# Altium PCB PCB_RTM_Loopback.PcbDoc
Units mil, origin at the board's own origin, x right, y up, seen from the top; angles counter-clockwise.
Board outline 1093.25 x 2496.1 mil, 4 copper layers (Top Layer, MidPlane_1, MidPlane_2, Bottom Layer), stack 61.899 mil thick; 15 components, 69 nets, 226 pads, 30 vias.
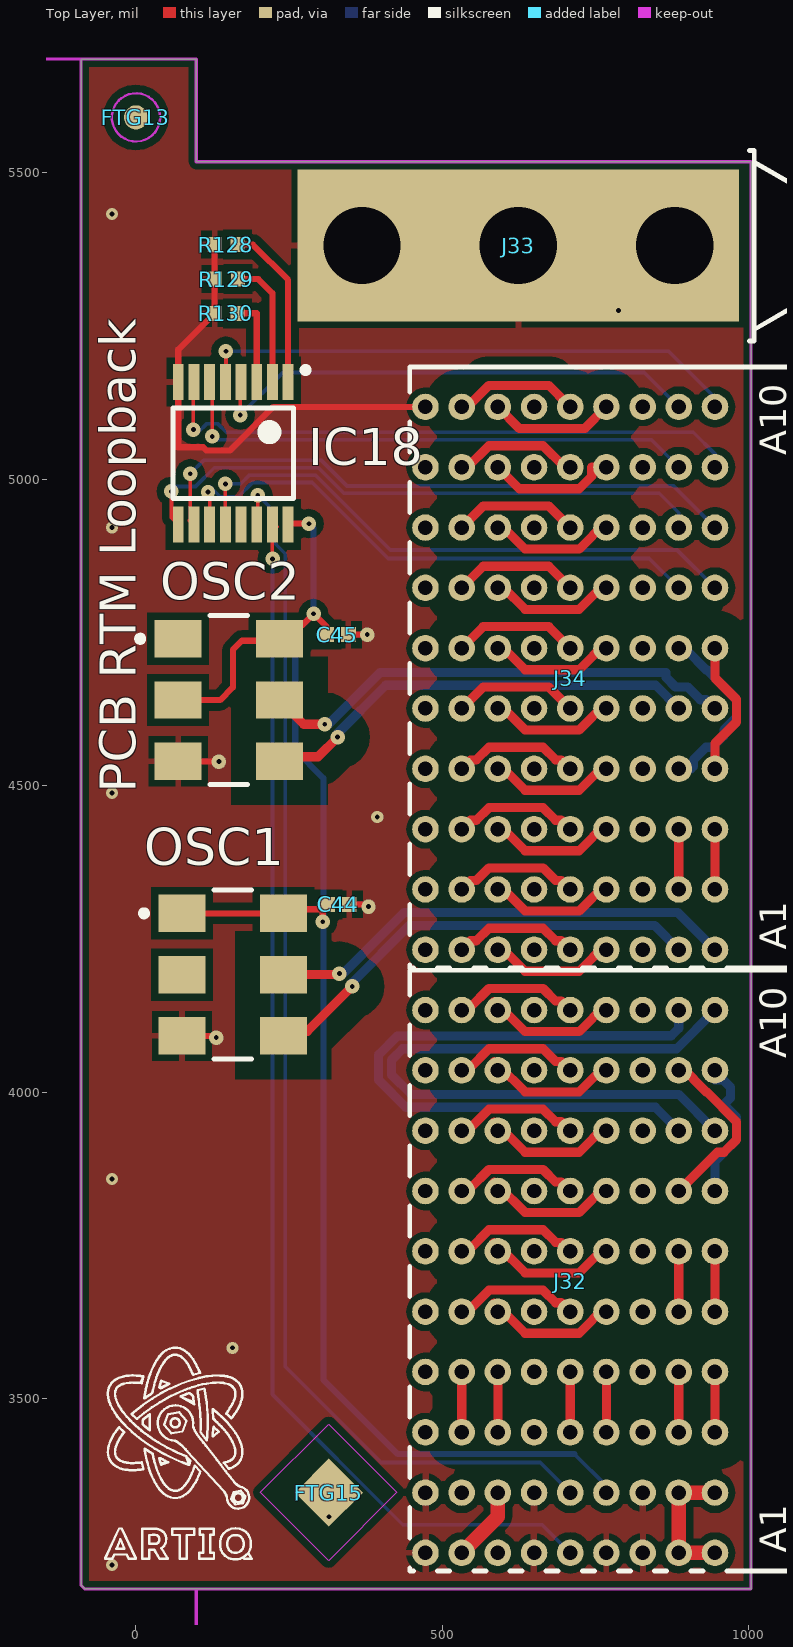
[diagram p0: Top Layer view]
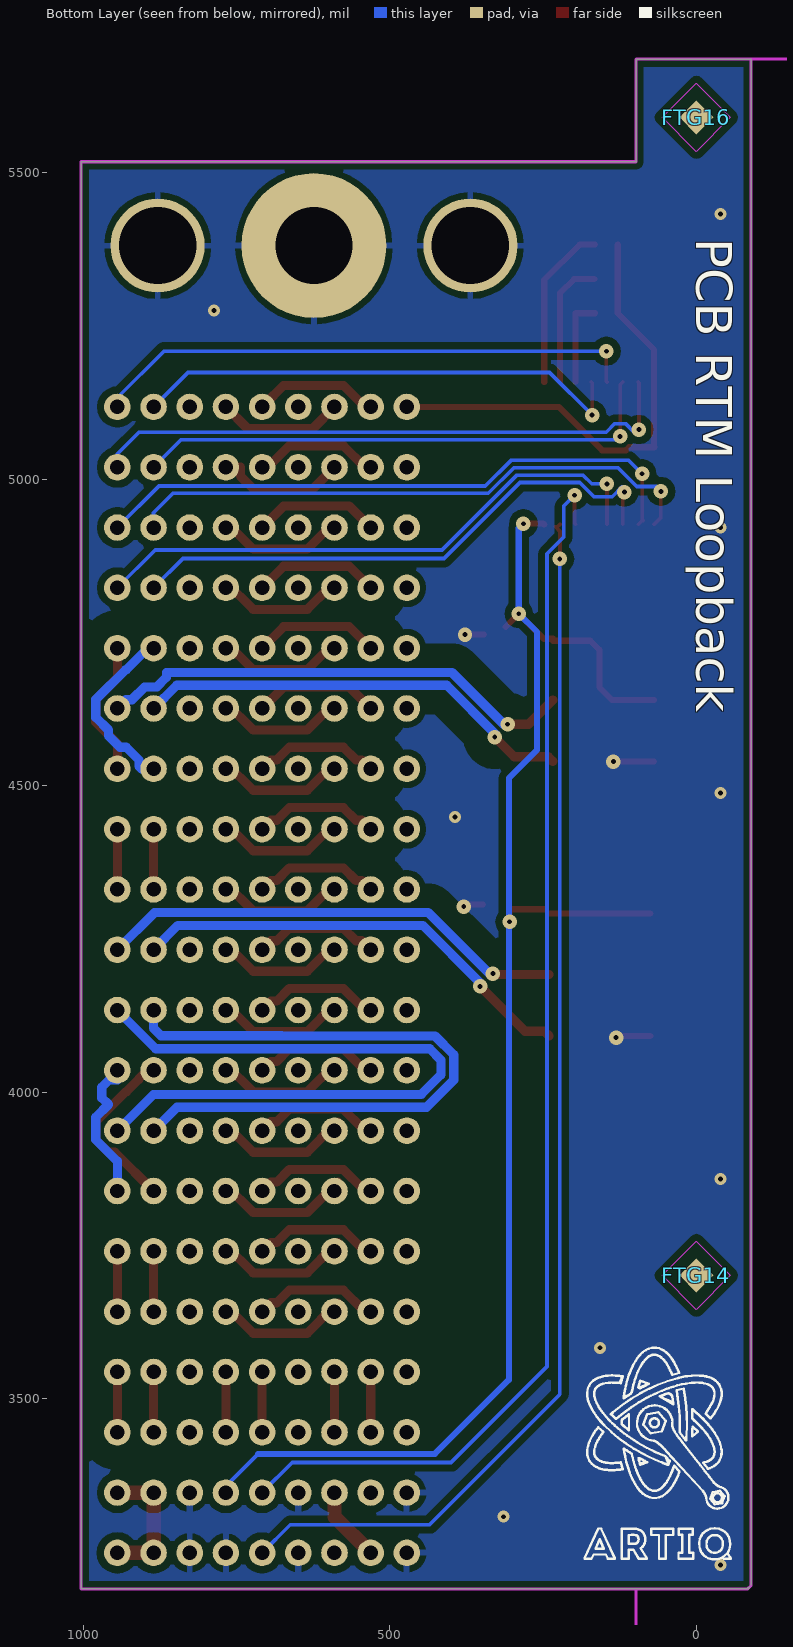
[diagram p1: Bottom Layer view, seen from below]
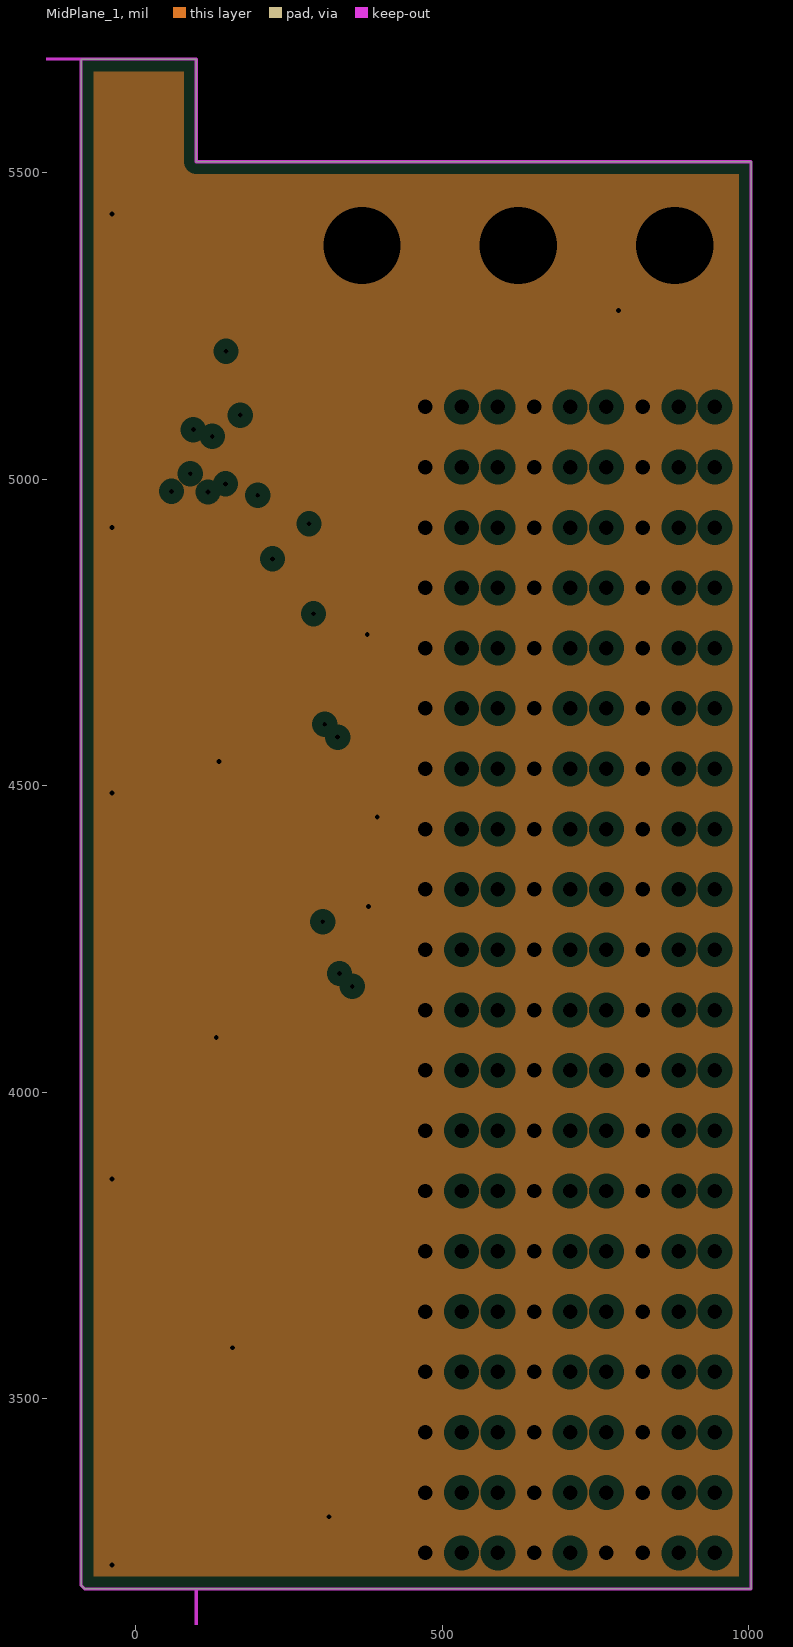
[diagram p2: MidPlane_1, clearances drawn from the general rule]
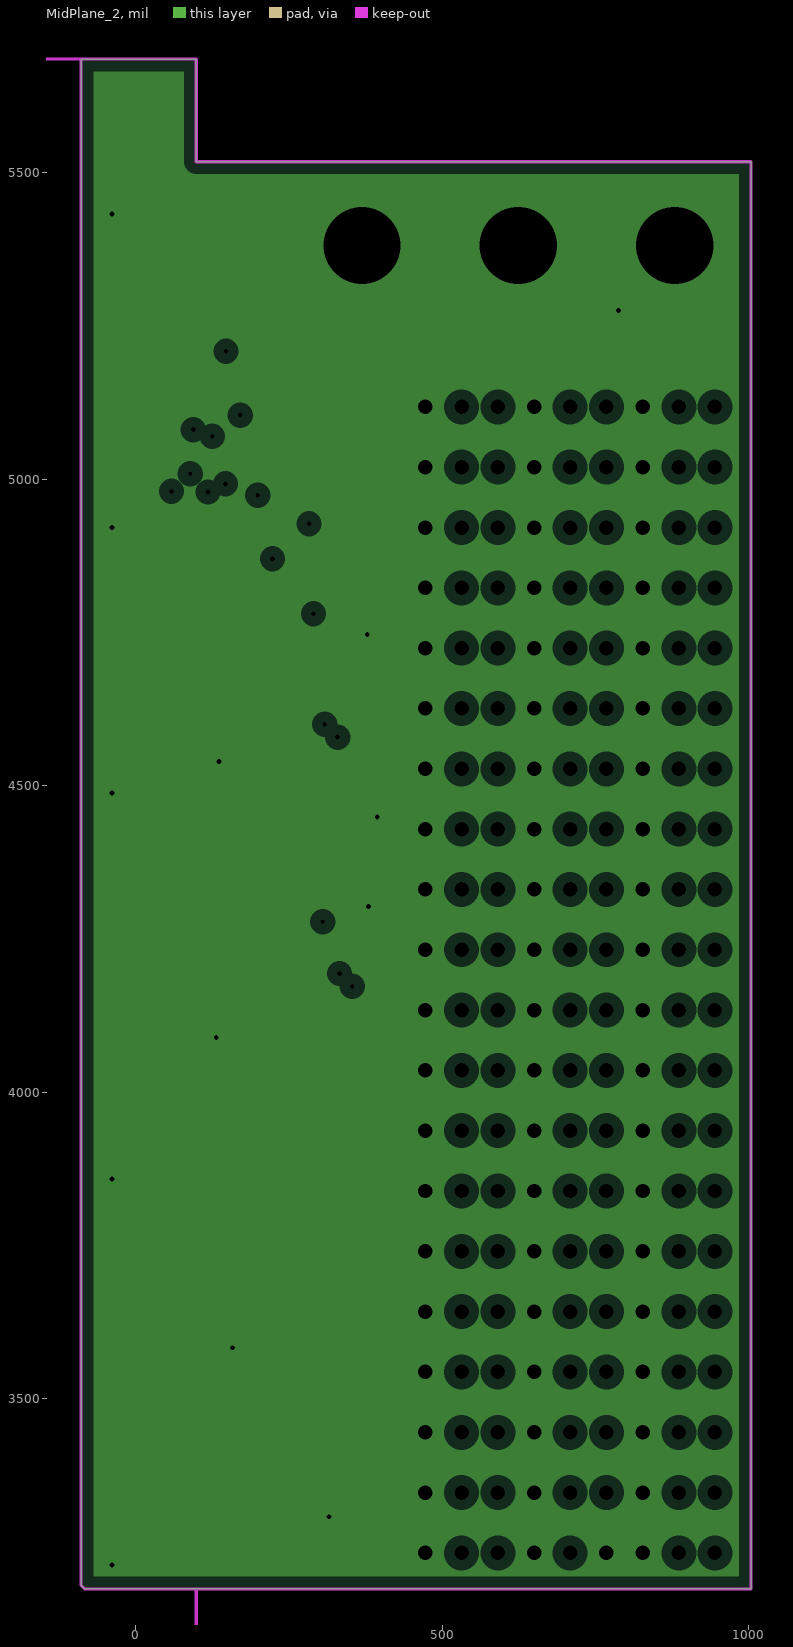
[diagram p3: MidPlane_2, clearances drawn from the general rule]
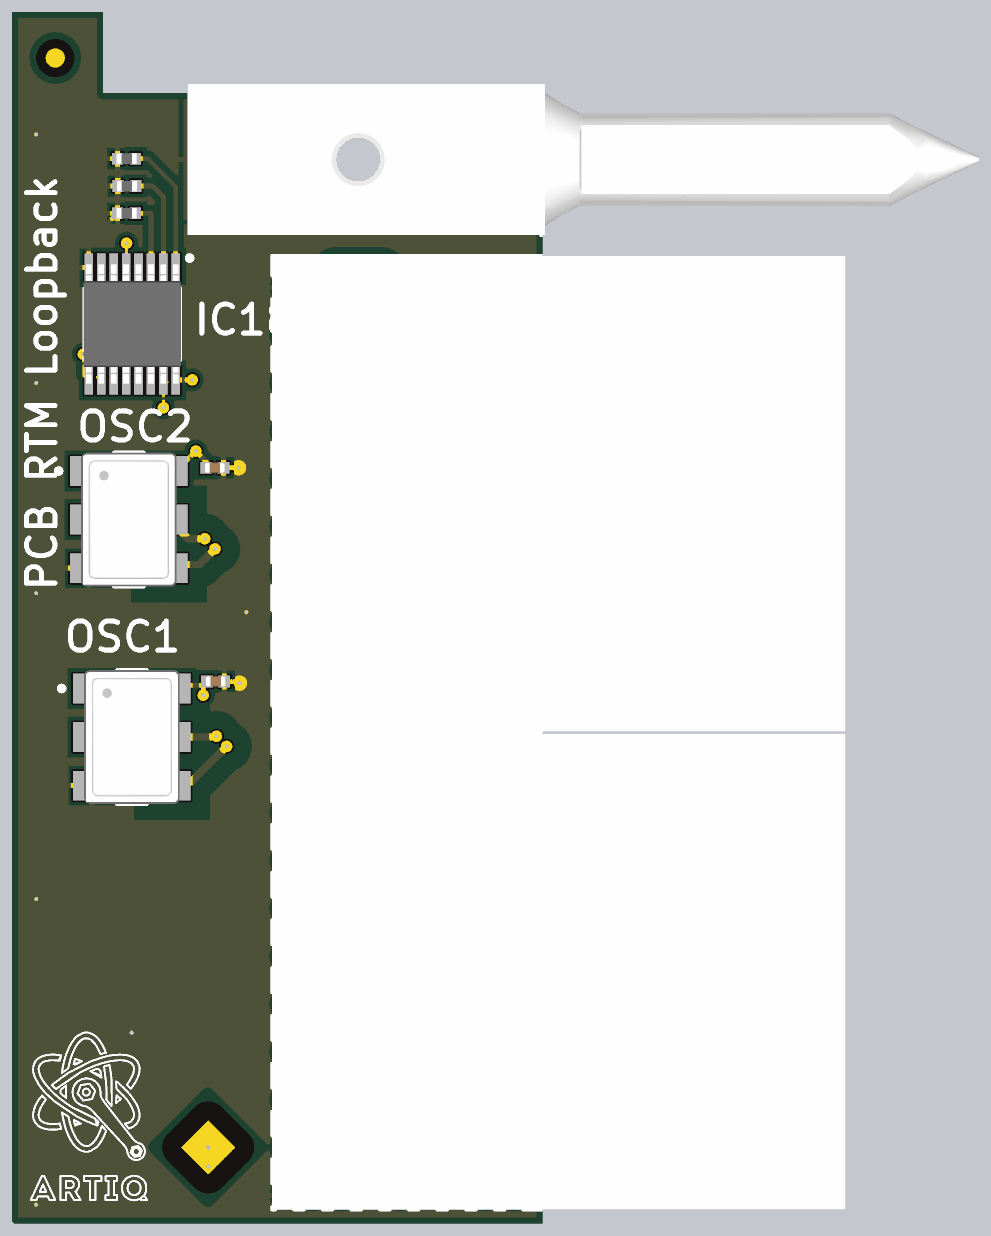
[diagram p4: 3D render of the assembled board from above, using the file's embedded part models]

## Layer stack, top to bottom
Top Solder: solder mask 0.4, Solder Resist, Dk 3.5
Top Layer: signal copper 1.4
Dielectric1: prepreg 14.1732, FR-4, Dk 4.8
MidPlane_1: plane copper 1.4, net GND
Dielectric3: core 27.9528, FR-4, Dk 4.8
MidPlane_2: plane copper 1.4, net GND
Dielectric2: prepreg 14.1732, FR-4, Dk 4.8
Bottom Layer: signal copper 1.4
Bottom Solder: solder mask 0.4, Solder Resist, Dk 3.5

## Board outline
-89.37,3194.88 -83.92,3189.43 1003.88,3189.43 1003.88,5518.13 98.38,5518.13 98.38,5685.53 -89.37,5685.53

## Design rules (kind name [scope] priority, off if disabled: settings)
Clearance Clearance_KO [OnLayer('Keep-Out Layer')] p1: gap=10
Clearance Clearance_Poly_DS [(InDifferentialPairClass('All Differential Pairs')) vs InPolygon] p2: gap=40
Clearance Clearance_Poly [InPolygon] p3: gap=11.81
Clearance Clearance_DS&CLK [(InNet('SFP_CLK*') OR InNet('FPGA_CLK*'))] p4: gap=6
Clearance Clearance_DS&RTM [WithinRoom('U_RTM_Connectors')] p5: gap=6
Clearance Clearance_DS [All] p6: gap=50
Clearance [All] p7: gap=6 except(15: Arc-Poly Track-Poly SMDPad-Poly THPad-Poly Via-Poly Fill-Poly Poly-Poly)
DiffPairsRouting [All] p1: maxlimit=6 minlimit=6 mostfreqgap=6 toplayer_minwidth=15 toplayer_maxwidth=15 toplayer_prefwidth=15 bottomlayer_minwidth=15 bottomlayer_maxwidth=15 bottomlayer_prefwidth=15 maxuncoupledlength=500
HoleSize [All] p1: absolutevalues=TRUE maxlimit=472.44 minlimit=1 maxpercent=80.000 minpercent=20.000
MinimumSolderMaskSliver [All] p1: minsoldermaskwidth=0
PlaneClearance [All] p1: clearance=16.73
PlaneConnect PlaneConnect_Via [IsVia] p1: planeconnectstyle=Direct reliefexpansion=20 reliefentries=4 reliefconductorwidth=10 reliefairgap=10
PlaneConnect [All] p2: planeconnectstyle=Relief reliefexpansion=10 reliefentries=4 reliefconductorwidth=10 reliefairgap=10
PolygonConnect PolygonConnect_Via [IsVia] p1: connectstyle=Direct reliefconductorwidth=10 reliefentries=4 polygonreliefangle="90 Angle" airgapwidth=10
PolygonConnect [All] p2: connectstyle=Relief reliefconductorwidth=10 reliefentries=4 polygonreliefangle="90 Angle" airgapwidth=10
RoomDefinition PCB_RTM_Loopback [InComponentClass('PCB_RTM_Loopback')] p1: confinementstyle=ConfineIn formatcopy=TRUE lockcomponents=FALSE outline -6375.21,3085.88 -4059.86,3085.88 -4059.86,3726.04 -6375.21,3726.04
RoutingVias [All] p1: holewidth=7.87 width=23.62 viastyle="Through Hole" minholewidth=7.87 minwidth=23.62 maxholewidth=23.62 maxwidth=47.24
SilkToSilkClearance [All] p1: silktosilkclearance=6
SilkToSolderMaskClearance SilkscreenOverComponentPads [IsPad] p1: minsilkscreentomaskgap=0 clearancetoexposedcopper=TRUE
SolderMaskExpansion [All] p1: expansion=4
Width Width_DS [(InDifferentialPairClass('All Differential Pairs'))] p1: maxlimit=12 minlimit=6 preferedwidth=12
Width [All] p2: maxlimit=23.54 minlimit=6 preferedwidth=23.54 minimp=50.000000 maximp=50.000000 favimp=50.000000
23 further rules are at their usual default settings.

## Classes and differential pairs
differential pair CLK2: +CLK2_P -CLK2_N
differential pair SFP8TX: +SFP8TX_P -SFP8TX_N
differential pair SFP8RX: +SFP8RX_P -SFP8RX_N
differential pair SFP7TX: +SFP7TX_P -SFP7TX_N
differential pair SFP7RX: +SFP7RX_P -SFP7RX_N
differential pair SFP6TX: +SFP6TX_P -SFP6TX_N
differential pair SFP6RX: +SFP6RX_P -SFP6RX_N
differential pair SFP5TX: +SFP5TX_P -SFP5TX_N
differential pair SFP5RX: +SFP5RX_P -SFP5RX_N
differential pair SFP4TX: +SFP4TX_P -SFP4TX_N
differential pair SFP4RX: +SFP4RX_P -SFP4RX_N
differential pair SFP3TX: +SFP3TX_P -SFP3TX_N
differential pair SFP3RX: +SFP3RX_P -SFP3RX_N
differential pair SFP2TX: +SFP2TX_P -SFP2TX_N
differential pair SFP2RX: +SFP2RX_P -SFP2RX_N
differential pair SFP1TX: +SFP1TX_P -SFP1TX_N
differential pair SFP1RX: +SFP1RX_P -SFP1RX_N
differential pair LVDS8: +LVDS8_P -LVDS8_N
differential pair LVDS7: +LVDS7_P -LVDS7_N
differential pair LVDS6: +LVDS6_P -LVDS6_N
differential pair LVDS5: +LVDS5_P -LVDS5_N
differential pair LVDS4: +LVDS4_P -LVDS4_N
differential pair LVDS3: +LVDS3_P -LVDS3_N
differential pair LVDS2: +LVDS2_P -LVDS2_N
differential pair LVDS1: +LVDS1_P -LVDS1_N
differential pair CLK1: +CLK1_P -CLK1_N

## Components (designator, comment, footprint, x,y, rotation, side; value= is the part's Value field where it differs from the comment)
C44 "100nF" CAPC1005X55N 330.32,4306.3 r180 top
C45 "100nF" CAPC1005X55N 328.74,4746.46 r180 top
FTG13 "Use only in PCB" FIDUCIAL_TOP_C100-200 0,5590.55 r90 top
FTG14 "Use only in PCB" FIDUCIAL_TOP_S100-200 0,3700.79 r90 bottom
FTG15 "Use only in PCB" FIDUCIAL_TOP_S200-400 314.96,3346.46 r0 top
FTG16 "Use only in PCB" FIDUCIAL_TOP_S100-200 0,5590.55 r90 bottom
IC18 "PCA9534PW" SOP65P640X110-16N 158.66,5042.52 r270 top
J32 "Family" TYCO_6469183-1 708.66,3690.95 r0 top locked
J33 "Family" TYCO_1469265-1 624,5381.35 r0 top
J34 "Family" TYCO_6469183-1 708.66,4675.2 r0 top locked
OSC1 "125MHz" OSC_SILICON-LAB_SI531 157.87,4191.73 r0 top
OSC2 "156.25MHz" OSC_SILICON-LAB_SI530 151.57,4639.76 r0 top
R128 "0" RESC1005X40N 146.85,5383.07 r0 top
R129 "0" RESC1005X40N 147.64,5326.77 r0 top
R130 "0" RESC1005X40N 146.85,5270.87 r0 top

## Footprints (in the part's own frame and the unit in brackets; to place one, negate y for a bottom-side part, rotate by r counter-clockwise, add the part's x,y. Pads: shape width x height; smd on the part's side, far side on the other; paste and mask are expansions set on the pad)
CAPC1005X55N [mm] "Chip Capacitor, Body 1.0x0.55mm, IPC Medium Density"
  rect 0.62x0.62 smd: 1(-0.45,0) 2(0.45,0)
  body extent -0.52,-0.27 0.53,0.28, height 0.55
FIDUCIAL_TOP_C100-200 [mm] "Round Fiducial Target, Top Layer, 1.0mm, Top Solder 2.0mm, Keepout =2.0mm"
  round 1 smd paste-0.51 mask+0.5: FTG2(0,0)
  Top Layer keep-out circle w0.1: c0,0 r1
FIDUCIAL_TOP_S100-200 [mm] "Square Fiducial Target, Top Layer, 1.0mm, Top Solder 2.0mm, Keepout =2.0mm"
  rect 1x1 smd rot 45 paste-0.51 mask+0.5: 1(0,0)
  Top Layer keep-out region: 1.414,0 0,-1.414 -1.414,0 0,1.414
FIDUCIAL_TOP_S200-400 [mm] "Square Fiducial Target, Top Layer, 2.0mm, Top Solder 4.0mm, Keepout =4.0mm"
  rect 2x2 smd rot 45 paste-0.9 mask+1: 1(0,0)
  Top Layer keep-out region: -2.839,0.011 -0.011,2.839 2.818,0.011 -0.011,-2.818
OSC_SILICON-LAB_SI530 [mm] "Oscillator Si530 Series, 6 pins, 5x7mm"
  rect 1.95x1.55 smd: 1(-2.1,2.54) 2(-2.1,0) 3(-2.1,-2.54) 4(2.1,-2.54) 5(2.1,0) 6(2.1,2.54)
  silkscreen extent -3.8,-3.5 0.77,3.5, body extent -2.5,-3.5 2.5,3.5, height 1.8
OSC_SILICON-LAB_SI531 [mm] "Oscillator Si531 Series, 6 pins, 5x7mm"
  rect 1.95x1.55 smd: 1(-2.1,2.54) 2(-2.1,0) 3(-2.1,-2.54) 4(2.1,-2.54) 5(2.1,0) 6(2.1,2.54)
  silkscreen extent -3.8,-3.5 0.77,3.5, body extent -2.5,-3.5 2.5,3.5, height 1.8
RESC1005X40N [mm] "Chip Resistor, EIA 0402, Metric 1005, Body 1.0x0.5mm, IPC Medium Density"
  rect 0.58x0.62 smd: 1(-0.47,0) 2(0.47,0)
  body extent -0.52,-0.27 0.53,0.28, height 0.4
SOP65P640X110-16N [mm] "SOP, 0.65mm pitch; 16 pin, 4.40mm W X 5.00mm L X 1.10mm H body IPC Medium Density"
  rect 1.5x0.45 smd: 1(-2.95,2.275) 2(-2.95,1.625) 3(-2.95,0.975) 4(-2.95,0.325) 5(-2.95,-0.325) 6(-2.95,-0.975) 7(-2.95,-1.625) 8(-2.95,-2.275) 9(2.95,-2.275) 10(2.95,-1.625) 11(2.95,-0.975) 12(2.95,-0.325) 13(2.95,0.325) 14(2.95,0.975) 15(2.95,1.625) 16(2.95,2.275)
  silkscreen extent -3.57,-2.5 1.88,3.13, body extent -3.12,-2.55 3.12,2.55, height 1.1
TYCO_1469265-1 [mm] "Universal Right Angle Male Power Module Guide (keyed)"
  round 3.9 hole 3.2: 1(-6.48,0) 1(6.48,0)
  rect 18.3x6.3 smd paste-4.15 mask-4.15: 1(0,0)
  round 6 hole 3.2: 1(0,0)
  silkscreen extent 9.58,-3.96 32.55,3.94, body extent -8.92,-3.95 32.53,3.95, height 9.7
TYCO_6469183-1 [mm] "60 Positions, Pitch 2.5mm,  Advanced TCA, Z-PACK HM-Zd BackPlane Press Fit Header"
  round 1.1 hole 0.6: A1(6,-11.25) A2(6,-8.75) A3(6,-6.25) A4(6,-3.75) A5(6,-1.25) A6(6,1.25) A7(6,3.75) A8(6,6.25) A9(6,8.75) A10(6,11.25) B1(4.5,-11.25) B2(4.5,-8.75) B3(4.5,-6.25) B4(4.5,-3.75) B5(4.5,-1.25) B6(4.5,1.25) B7(4.5,3.75) B8(4.5,6.25) B9(4.5,8.75) B10(4.5,11.25) BG1(3,-11.25) BG2(3,-8.75) BG3(3,-6.25) BG4(3,-3.75) BG5(3,-1.25) BG6(3,1.25) BG7(3,3.75) BG8(3,6.25) BG9(3,8.75) BG10(3,11.25) C1(1.5,-11.25) C2(1.5,-8.75) C3(1.5,-6.25) C4(1.5,-3.75) C5(1.5,-1.25) C6(1.5,1.25) C7(1.5,3.75) C8(1.5,6.25) C9(1.5,8.75) C10(1.5,11.25) D1(0,-11.25) D2(0,-8.75) D3(0,-6.25) D4(0,-3.75) D5(0,-1.25) D6(0,1.25) D7(0,3.75) D8(0,6.25) D9(0,8.75) D10(0,11.25) DG1(-1.5,-11.25) DG2(-1.5,-8.75) DG3(-1.5,-6.25) DG4(-1.5,-3.75) DG5(-1.5,-1.25) DG6(-1.5,1.25) DG7(-1.5,3.75) DG8(-1.5,6.25) DG9(-1.5,8.75) DG10(-1.5,11.25) E1(-3,-11.25) E2(-3,-8.75) E3(-3,-6.25) E4(-3,-3.75) E5(-3,-1.25) E6(-3,1.25) E7(-3,3.75) E8(-3,6.25) E9(-3,8.75) E10(-3,11.25) F1(-4.5,-11.25) F2(-4.5,-8.75) F3(-4.5,-6.25) F4(-4.5,-3.75) F5(-4.5,-1.25) F6(-4.5,1.25) F7(-4.5,3.75) F8(-4.5,6.25) F9(-4.5,8.75) F10(-4.5,11.25) FG1(-6,-11.25) FG2(-6,-8.75) FG3(-6,-6.25) FG4(-6,-3.75) FG5(-6,-1.25) FG6(-6,1.25) FG7(-6,3.75) FG8(-6,6.25) FG9(-6,8.75) FG10(-6,11.25)
  silkscreen extent -6.65,-12 23.35,12.9, body extent -6.65,-12 23.35,12.9, height 13.31

## Part data
C44 C45: library part CC0402_100NF_16V_10%_X7R, "Non-polarised capacitor"
FTG13: library part FIDUCIAL_TARGET_C100-200, "Fiducial Target"
FTG14 FTG16: library part FIDUCIAL_TARGET_S100-200, "Fiducial Target"
FTG15: library part FIDUCIAL_TARGET_S200-400, "Fiducial Target"
IC18: "8-Bit I2C-Bus and SMBus Low Power I/O Port with Interrupt"
J32 J34: library part TYCO_6469183-1, "Connector 60 ATCA Male 30 Pairs (60 Signals) + 3x10 Ground"
J33: library part TYCO_1469265-1, "Single Pin Male"
OSC1: library part OSC_125MHZ_SILICON-LAB_531BC125M000DG, "10-1400MHz, Crystal Oscillator (XO), Si531 Series"
OSC2: library part OSC_156.25MHZ_SILICON-LAB_530BC156M250DG, "10-1400MHz, Crystal Oscillator (XO), Si530 Series"
R128 R129 R130: library part R0402_0R_JUMPER, "Resistor"

## Via types
v1: diameter 23.62, hole 7.87, Top Layer to Bottom Layer, 21 vias
v2: diameter 19.68, hole 7.87, Top Layer to Bottom Layer, tented both sides, 9 vias

## Nets (pads, with @x,y where several pads share a name; then routed paths per layer and width w, separated by ;. In a path a pad name is that pad's centre, name@x,y a point inside that pad or via, vN(x,y) a via of type N, cw(c..) or ccw(c..) an arc to the next point about the centre after c; other vN are vias at no path point)
CLK1_N: J34.A1 OSC1.5 | length 771.5
  Top Layer w15: OSC1.5 330.35,4191.73 v1(332.1,4193.49)
  Bottom Layer w15: v1(332.1,4193.49) 338.2,4193.49 437.76,4293.05 884.12,4293.05 J34.A1
CLK1_P: J34.B1 OSC1.4 | length 740
  Top Layer w15: OSC1.4 248.05,4099.23 279.74,4099.23 v1(353.05,4172.54)
  Bottom Layer w15: v1(353.05,4172.54) 353.05,4178.64 446.46,4272.05 846.06,4272.05 J34.B1
CLK2_N: J34.A5 OSC2.5 | length 792.3
  Top Layer w15: OSC2.5 273.83,4600.18 v1(308.09,4600.18)
  Bottom Layer w15: v1(308.09,4600.18) 309.17,4599.1 313.1,4599.1 398.78,4684.78 864.83,4684.78 864.83,4676.68 880.37,4661.14 900.39,4661.14 920.98,4640.55 920.98,4640.14 930.73,4640.14 J34.A5
CLK2_P: J34.B5 OSC2.4 | length 723.1
  Top Layer w15: OSC2.4 241.75,4547.26 297.06,4547.26 v1(329.03,4579.24)
  Bottom Layer w15: v1(329.03,4579.24) 327.95,4580.31 327.95,4584.25 407.48,4663.78 848.03,4663.78 J34.B5
GND: C44.1 C45.1 IC18.8 J32.BG1 J32.BG2 J32.BG3 J32.BG4 J32.BG5 J32.BG6 J32.BG7 J32.BG8 J32.BG9 J32.BG10 J32.C1 J32.DG1 J32.DG2 J32.DG3 J32.DG4 J32.DG5 J32.DG6 J32.DG7 J32.DG8 J32.DG9 J32.DG10 J32.FG1 J32.FG2 J32.FG3 J32.FG4 J32.FG5 J32.FG6 J32.FG7 J32.FG8 J32.FG9 J32.FG10 J33.1 J34.BG1 J34.BG2 J34.BG3 J34.BG4 J34.BG5 J34.BG6 J34.BG7 J34.BG8 J34.BG9 J34.BG10 J34.DG1 J34.DG2 J34.DG3 J34.DG4 J34.DG5 J34.DG6 J34.DG7 J34.DG8 J34.DG9 J34.DG10 J34.FG1 J34.FG2 J34.FG3 J34.FG4 J34.FG5 J34.FG6 J34.FG7 J34.FG8 J34.FG9 J34.FG10 OSC1.3 OSC2.3 R128.1 R129.1 R130.1 | length 984.5
  Top Layer w10: OSC2.3 135.04,4539.76 v1(135.43,4539.37) ; OSC1.3 128.35,4091.73 v1(131.1,4088.98) ; R128.1 R130.1 69.09,5211.61 IC18.8 69.09,5052.95 68.5,5052.36 109.87,5052.36 114.96,5047.27 153.57,5047.27 224.41,5118.11 J34.FG10 ; C45.1 v1(377.56,4746.46) ; C44.1 375.91,4306.3 v1(379.48,4302.73) v1@385.35,4302.73
  other v2: -39.37,3228.35 314.96,3307.09 157.48,3582.68 -39.37,3858.27 393.7,4448.82 -39.37,4488.19 -39.37,4921.26 787.4,5275.59 -39.37,5433.07
IO0: IC18.4 J34.B10 | length 822.4
  Top Layer w6: v1(170.08,5104.72) 170.08,5157.28 IC18.4
  Bottom Layer w6: v1(170.08,5104.72) 239.76,5174.41 829.53,5174.41 J34.B10
IO1: IC18.5 J34.A10 | length 895.3
  Top Layer w6: IC18.5 146.85,5159.65 v1(146.85,5209.06)
  Bottom Layer w6: v1(146.85,5209.06) 868.9,5209.06 944.88,5133.07 J34.A10
IO2: IC18.6 J34.B9 | length 872.6
  Top Layer w6: IC18.6 124.41,5154.53 v1(124.41,5070.08)
  Bottom Layer w6: v1(124.41,5070.08) 129.72,5064.77 840.74,5064.77 J34.B9
IO3: IC18.7 J34.A9 | length 979
  Top Layer w6: v1(93.7,5081.1) 93.7,5157.68 IC18.7
  Bottom Layer w6: v1(93.7,5081.1) 98.03,5076.77 101.67,5076.77 115.79,5090.89 133.03,5090.89 147.15,5076.77 909.45,5076.77 944.88,5041.34 J34.A9
IO4: IC18.9 J34.B8 | length 957
  Top Layer w6: v1(57.87,4980.31) 57.87,4937.6 IC18.9
  Bottom Layer w6: v1(57.87,4980.31) 65.8,4988.24 97.2,4988.24 127.79,5018.83 297.71,5018.83 339.5,4977.03 854.07,4977.03 885.83,4945.28 J34.B8
IO5: IC18.10 J34.A8 | length 998.1
  Top Layer w6: v1(88.58,5009.06) 88.58,4934.31 86.95,4932.68 88.39,4932.68 IC18.10
  Bottom Layer w6: v1(88.58,5009.06) 110.35,5030.83 302.68,5030.83 344.47,4989.03 877.11,4989.03 J34.A8
IO6: IC18.11 J34.B7 | length 925.1
  Top Layer w6: v1(117.54,4979.15) 117.54,4980.92 120.28,4983.65 IC18.11
  Bottom Layer w6: v1(117.54,4979.15) 117.54,4983.98 121.36,4987.8 137.44,4971.71 167.08,4971.71 190.2,4994.83 287.77,4994.83 411.73,4870.87 837.8,4870.87 J34.B7
IO7: IC18.12 J34.A7 | length 947.2
  Top Layer w6: IC18.12 145.87,4992.32 v1(146.06,4992.52)
  Bottom Layer w6: v1(146.06,4992.52) 170.92,4992.52 185.23,5006.83 292.74,5006.83 414.92,4884.65 883.07,4884.65 J34.A7
LVDS1_N: J32.A7 J32.A9 | length 242.6
  Bottom Layer w15: J32.A7 944.88,3887.29 980.04,3922.45 980.04,3959.05 959.39,3979.69 970.21,3990.51 970.21,4007.91 957.91,4020.21 944.88,4020.21 J32.A9
LVDS1_P: J32.B7 J32.B9 | length 287.6
  Top Layer w15: J32.B7 949.1,3901.85 959.44,3901.85 980.04,3922.45 980.04,3951.57 931.32,4000.28 930.32,4000.28 909.73,4020.87 909.73,4021.88 896.17,4035.43 J32.B9
LVDS2_N: J32.A8 J32.A10 | length 1151.7
  Bottom Layer w15: J32.A8 885.69,3996.2 449.08,3996.2 416.93,4028.35 416.93,4052.36 435.15,4070.59 696.96,4070.59 697.24,4070.87 882.28,4070.87 944.88,4133.46 J32.A10
LVDS2_P: J32.B8 J32.B10 | length 1104.2
  Bottom Layer w15: J32.B10 885.83,4104.11 873.59,4091.87 676.8,4091.87 676.52,4091.59 426.46,4091.59 395.93,4061.06 395.93,4019.65 440.38,3975.2 847.64,3975.2 J32.B8 J32.B8@887.01,3937.01
LVDS3_N: J32.A5 J32.A6 | length 98.4
  Top Layer w15: J32.A5 J32.A6
LVDS3_P: J32.B5 J32.B6 | length 98.4
  Top Layer w15: J32.B5 J32.B6
LVDS4_N: J32.A3 J32.A4 | length 98.4
  Top Layer w15: J32.A3 J32.A4
LVDS4_P: J32.B3 J32.B4 | length 98.4
  Top Layer w15: J32.B3 J32.B4
LVDS5_N: J32.C3 J32.C4 | length 98.4
  Top Layer w15: J32.C3 J32.C4
LVDS5_P: J32.D3 J32.D4 | length 98.4
  Top Layer w15: J32.D3 J32.D4
LVDS6_N: J32.E3 J32.E4 | length 98.4
  Top Layer w15: J32.E3 J32.E4
LVDS6_P: J32.F3 J32.F4 | length 98.4
  Top Layer w15: J32.F3 J32.F4
LVDS7_N: J34.A4 J34.A6 | length 226
  Top Layer w15: J34.A4 944.88,4568.79 980.04,4603.94 980.04,4640.55 944.88,4675.7 J34.A6
LVDS7_P: J34.B4 J34.B6 | length 281.9
  Bottom Layer w15: J34.B4 905.51,4527.56 909.73,4531.78 909.73,4542.12 930.32,4562.71 940.67,4562.71 959.44,4581.49 959.44,4590.83 980.04,4611.42 980.04,4640.55 931.32,4689.26 930.32,4689.26 J34.B6@900.34,4719.24
LVDS8_N: J34.A2 J34.A3 | length 98.4
  Top Layer w15: J34.A2 J34.A3
LVDS8_P: J34.B2 J34.B3 | length 98.4
  Top Layer w15: J34.B2 J34.B3
NetIC18_1: IC18.1 R128.2 | length 273.5
  Top Layer w10: R128.2 190.55,5383.07 248.23,5325.39 IC18.1
NetIC18_2: IC18.2 R129.2 | length 211.1
  Top Layer w10: R129.2 199.61,5326.77 222.64,5303.74 IC18.2
NetIC18_3: IC18.3 R130.2 | length 143.9
  Top Layer w10: R130.2 197.05,5270.87 IC18.3
NetIC18_14: IC18.14 J32.D2 | length 2039.1
  Top Layer w6: IC18.14 198.82,4928.15 v1(198.82,4974.02)
  Bottom Layer w6: v1(198.82,4974.02) 216.54,4956.3 216.54,4905.81 243.65,4878.7 243.65,3552.02 400.22,3395.45 659.67,3395.45 J32.D2
NetIC18_15: IC18.15 J32.D1 | length 2021.4
  Top Layer w6: IC18.15 226.57,4922.44 230.37,4922.44 222.64,4914.71 222.64,4870.28 v1(222.83,4870.08)
  Bottom Layer w6: v1(222.83,4870.08) 222.83,3506.69 435.43,3294.09 662.6,3294.09 J32.D1
NetJ32_e2: J32.E2 J32.F1 | length 122.9
  Top Layer w23.54: J32.F1 590.55,3307.09 J32.E2
P3V3MP: C44.2 C45.2 IC18.16 J32.C2 OSC1.1 OSC1.6 OSC2.2 OSC2.6 | length 2597.8
  Top Layer w10: OSC2.2 137.4,4639.76 158.27,4660.63 158.27,4722.05 172.83,4736.61 OSC2.6@234.25,4736.61 ; OSC1.1 OSC1.6 ; OSC2.6 248.82,4739.76 v1(289.76,4780.71) 311.02,4759.45 ; OSC1.6@247.24,4298.43 304.72,4298.43 v1(304.72,4277.95) ; IC18.16 249.41,4927.56 v1(282.28,4927.56)
  Bottom Layer w6: 715.35,3409.45 767.72,3357.09 J32.C2
  Bottom Layer w10: v1(282.28,4927.56) 289.76,4920.08 v1(289.76,4780.71) 259.84,4750.79 259.84,4558.27 305.91,4512.2 305.91,3530.31 426.77,3409.45 715.35,3409.45
P12V: J32.A1 J32.A2 J32.B1 J32.B2 | length 230.6
  Top Layer w23.54: J32.A1 895.77,3248.03 885.83,3238.09 J32.B1 J32.B2 J32.A2
SFP1RX_N: J34.D10 J34.F10 | length 192.4
  Top Layer w15: J34.F10@546.01,5123.28 575.99,5153.26 673.51,5153.26 703.99,5122.78 J34.D10@703.99,5113.44
SFP1RX_P: J34.C10 J34.E10 | length 206.3
  Top Layer w15: J34.E10 625.7,5082.96 732.56,5082.96 J34.C10
SFP1TX_N: J32.D10 J32.F10 | length 191.9
  Top Layer w15: J32.F10@544.43,4137.46 575.99,4169.01 664.17,4169.01 684.76,4148.42 694.1,4148.42 J32.D10
SFP1TX_P: J32.C10 J32.E10 | length 232.7
  Top Layer w15: J32.E10@584.69,4148.01 592.94,4139.76 592.94,4140.81 635.05,4098.7 723.22,4098.7 767.72,4143.2 J32.C10
SFP2RX_N: J34.D9 J34.F9 | length 206.6
  Top Layer w15: J34.F9 540.84,5019.69 575.99,5054.84 664.17,5054.84 698.82,5020.19 698.82,5019.69 J34.D9
SFP2RX_P: J34.C9 J34.E9 | length 214.8
  Top Layer w15: J34.E9 625.7,4984.53 723.22,4984.53 743.81,5005.12 743.81,5019.69 J34.C9
SFP2TX_N: J32.D9 J32.F9 | length 191.9
  Top Layer w15: J32.F9@544.43,4039.03 575.99,4070.59 664.17,4070.59 684.76,4049.99 694.1,4049.99 J32.D9
SFP2TX_P: J32.C9 J32.E9 | length 232.7
  Top Layer w15: J32.E9@584.69,4049.59 592.94,4041.34 592.94,4042.39 635.05,4000.28 723.22,4000.28 767.72,4044.77 J32.C9
SFP3RX_N: J34.D8 J34.F8 | length 206.3
  Top Layer w15: J34.F8 566.65,4956.41 673.51,4956.41 J34.D8
SFP3RX_P: J34.C8 J34.E8 | length 220.5
  Top Layer w15: J34.E8 599.21,4921.26 599.21,4921.94 635.05,4886.11 723.22,4886.11 767.72,4930.6 J34.C8
SFP3TX_N: J32.D8 J32.F8 | length 191.9
  Top Layer w15: J32.F8@544.43,3940.61 575.99,3972.16 664.17,3972.16 684.76,3951.57 694.1,3951.57 J32.D8
SFP3TX_P: J32.C8 J32.E8 | length 232.7
  Top Layer w15: J32.E8@584.69,3951.16 592.94,3942.91 592.94,3943.96 635.05,3901.85 723.22,3901.85 767.72,3946.35 J32.C8
SFP4RX_N: J34.D7 J34.F7 | length 206.3
  Top Layer w15: J34.F7 566.65,4857.99 673.51,4857.99 J34.D7
SFP4RX_P: J34.C7 J34.E7 | length 220.5
  Top Layer w15: J34.E7 599.21,4822.83 599.21,4823.51 635.05,4787.68 723.22,4787.68 767.72,4832.18 J34.C7
SFP4TX_N: J32.D7 J32.F7 | length 191.9
  Top Layer w15: J32.F7@544.43,3842.18 575.99,3873.74 664.17,3873.74 684.76,3853.14 694.1,3853.14 J32.D7
SFP4TX_P: J32.C7 J32.E7 | length 232.7
  Top Layer w15: J32.E7@584.69,3852.74 592.94,3844.49 592.94,3845.54 635.05,3803.43 723.22,3803.43 767.72,3847.92 J32.C7
SFP5RX_N: J34.D6 J34.F6 | length 206.3
  Top Layer w15: J34.F6 566.65,4759.56 673.51,4759.56 J34.D6
SFP5RX_P: J34.C6 J34.E6 | length 220.5
  Top Layer w15: J34.E6 599.21,4724.41 599.21,4725.09 635.05,4689.26 723.22,4689.26 767.72,4733.75 J34.C6
SFP5TX_N: J32.D6 J32.F6 | length 191.9
  Top Layer w15: J32.F6@544.43,3743.76 575.99,3775.31 664.17,3775.31 684.76,3754.72 694.1,3754.72 J32.D6
SFP5TX_P: J32.C6 J32.E6 | length 232.7
  Top Layer w15: J32.E6@584.69,3754.31 592.94,3746.06 592.94,3747.11 635.05,3705 723.22,3705 767.72,3749.5 J32.C6
SFP6RX_N: J34.D5 J34.F5 | length 206.3
  Top Layer w15: J34.F5 566.65,4661.14 673.51,4661.14 J34.D5
SFP6RX_P: J34.C5 J34.E5 | length 220.5
  Top Layer w15: J34.E5 599.21,4625.98 599.21,4626.66 635.05,4590.83 723.22,4590.83 767.72,4635.32 J34.C5
SFP6TX_N: J32.D5 J32.F5 | length 191.9
  Top Layer w15: J32.F5@544.43,3645.33 575.99,3676.89 664.17,3676.89 684.76,3656.29 694.1,3656.29 J32.D5
SFP6TX_P: J32.C5 J32.E5 | length 232.7
  Top Layer w15: J32.E5@584.69,3655.89 592.94,3647.64 592.94,3648.69 635.05,3606.58 723.22,3606.58 767.72,3651.07 J32.C5
SFP7RX_N: J34.D4 J34.F4 | length 206.3
  Top Layer w15: J34.F4 546.06,4542.12 555.4,4542.12 575.99,4562.71 664.17,4562.71 684.76,4542.12 694.1,4542.12 J34.D4
SFP7RX_P: J34.C4 J34.E4 | length 220.5
  Top Layer w15: J34.E4 599.21,4527.56 599.21,4528.24 635.05,4492.41 723.22,4492.41 767.72,4536.9 J34.C4
SFP7TX_N: J34.D2 J34.F2 | length 206.3
  Top Layer w15: J34.F2 546.06,4345.27 555.4,4345.27 575.99,4365.86 664.17,4365.86 684.76,4345.27 694.1,4345.27 J34.D2
SFP7TX_P: J34.C2 J34.E2 | length 220.5
  Top Layer w15: J34.E2 599.21,4330.71 599.21,4331.39 635.05,4295.56 723.22,4295.56 767.72,4340.05 J34.C2
SFP8RX_N: J34.D3 J34.F3 | length 206.3
  Top Layer w15: J34.F3 546.06,4443.69 555.4,4443.69 575.99,4464.29 664.17,4464.29 684.76,4443.69 694.1,4443.69 J34.D3
SFP8RX_P: J34.C3 J34.E3 | length 220.5
  Top Layer w15: J34.E3 599.21,4429.13 599.21,4429.81 635.05,4393.98 723.22,4393.98 767.72,4438.47 J34.C3
SFP8TX_N: J34.D1 J34.F1 | length 206.3
  Top Layer w15: J34.F1 546.06,4246.84 555.4,4246.84 575.99,4267.44 664.17,4267.44 684.76,4246.84 694.1,4246.84 J34.D1
SFP8TX_P: J34.C1 J34.E1 | length 220.5
  Top Layer w15: J34.E1 599.21,4232.28 599.21,4232.96 635.05,4197.13 723.22,4197.13 767.72,4241.62 J34.C1
pads on no net: FTG13.FTG2 FTG14.1 FTG15.1 FTG16.1 IC18.13 J32.E1 J32.F2 OSC1.2 OSC2.1

## Polygon pours and split planes (outlines as drawn)
GND on Top Layer "Top Overlay-No Net" (solid, remove dead copper, pour order 0): -157.48,5748.03 -118.11,5708.66 1102.36,5708.66 1102.36,3149.61 1141.73,3110.24 -196.85,3110.24
GND on Bottom Layer "Top Overlay-No Net" (solid, remove dead copper, pour order 2): -236.22,5787.4 -196.85,5748.03 1062.99,5748.03 1062.99,3149.61 1023.62,3110.24 -157.48,3110.24
GND on MidPlane_1 (split plane): 78.29,5518.13 78.67,5514.21 79.81,5510.44 81.67,5506.97 84.17,5503.92 87.22,5501.42 90.69,5499.56 94.46,5498.42 98.38,5498.03 983.79,5498.03 983.79,3209.53 -69.27,3209.53 -69.27,5665.43 78.29,5665.43
GND on MidPlane_2 (split plane): 78.29,5518.13 78.67,5514.21 79.81,5510.44 81.67,5506.97 84.17,5503.92 87.22,5501.42 90.69,5499.56 94.46,5498.42 98.38,5498.03 983.79,5498.03 983.79,3209.53 -69.27,3209.53 -69.27,5665.43 78.29,5665.43

## Keep-outs
Keep-Out Layer:
  lines w5: 98.38,3189.43 1003.88,3189.43 ; 98.38,3189.43 -83.92,3189.43 -89.37,3194.88 -89.37,5685.53 98.38,5685.53 ; 98.38,3189.43 1003.88,3189.43 ; 98.38,3189.43 98.38,-160.97 -5645.72,-160.97 -5645.72,-121.57 -5944.92,-121.57 -5944.92,43.73 -6181.12,43.73 -6181.12,5642.23 -5615.72,5642.23 -5615.72,5622.53 -5291.32,5622.53 -5291.32,5685.53 98.38,5685.53 ; 98.38,5518.13 98.38,5685.53 ; 98.38,5518.13 1003.88,5518.13 ; 98.38,5518.13 98.38,5685.53 ; 98.38,5518.13 1003.88,5518.13 ; 1003.88,3189.43 1003.88,5518.13 ; 1003.88,3189.43 1003.88,5518.13

## Silkscreen, mask and mechanical layers (free items; w line width, h text height)
Top Overlay:
  drawing of 1216 lines, arcs and shapes, not listed
  text "PCB RTM Loopback" at 0,4488.19 h59.06 r90
Bottom Overlay:
  drawing of 1216 lines, arcs and shapes, not listed
  text "PCB RTM Loopback" at 0,5393.7 h59.06 r90
Outline:
  lines w5: -89.37,3194.88 -89.37,5685.53 98.38,5685.53 98.38,5518.13 1003.88,5518.13 1003.88,3189.43 98.38,3189.43 -83.92,3189.43 -89.37,3194.88
Dimensions:
  drawing of 2050 lines, arcs and shapes, not listed

## Text inside footprints (layer, text, board x,y; h text height)
J32: Drill Drawing "diam. 0.6mm +0.06 -0" at 1064.96,3372.05 h39.37 r90; Drill Drawing "PRESS-FIT TECHNOLOGY" at 425.2,3389.76 h39.37 r90; Mechanical 8 "PCB Edge" at 1057.68,3570.87 h39.37 r90; Top Overlay "A10" at 1061.02,4055.12 h43.31 r90; Top Overlay "A1" at 1061.02,3248.03 h43.31 r90; Mechanical 14 "A10" at 1061.02,4055.12 h43.31 r90; Mechanical 14 "A1" at 1061.02,3248.03 h43.31 r90
J33: Mechanical 8 "PCB Edge" at 1062.98,5246.51 h39.37 r90
J34: Drill Drawing "diam. 0.6mm +0.06 -0" at 1064.96,4356.3 h39.37 r90; Drill Drawing "PRESS-FIT TECHNOLOGY" at 425.2,4374.02 h39.37 r90; Mechanical 8 "PCB Edge" at 1057.68,4555.12 h39.37 r90; Top Overlay "A10" at 1061.02,5039.37 h43.31 r90; Top Overlay "A1" at 1061.02,4232.28 h43.31 r90; Mechanical 14 "A10" at 1061.02,5039.37 h43.31 r90; Mechanical 14 "A1" at 1061.02,4232.28 h43.31 r90